# Altium PCB PHX_COLDFLOW_CONTROLLER.PcbDoc
Units mil, origin at the board's own origin, x right, y up, seen from the top; angles counter-clockwise.
Board outline 2730.15 x 2079.62 mil, 2 copper layers (Top Layer, Bottom Layer); 6 components, 12 nets, 70 pads, 4 vias.
Unrouted connection lines stored in the file: 4.
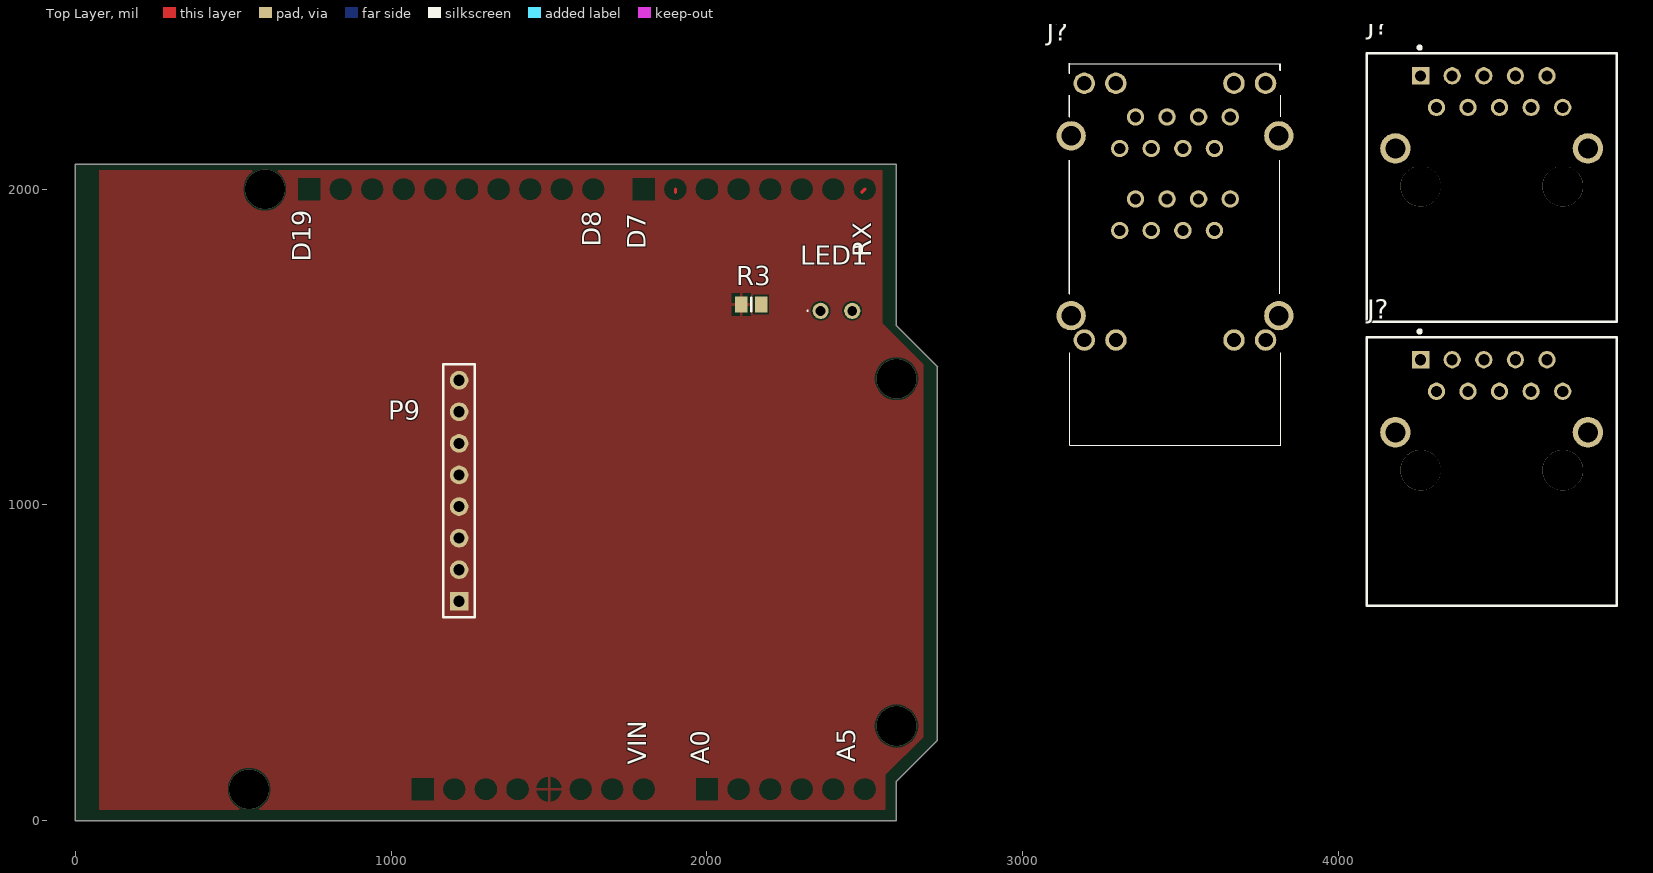
[diagram p0: Top Layer view]
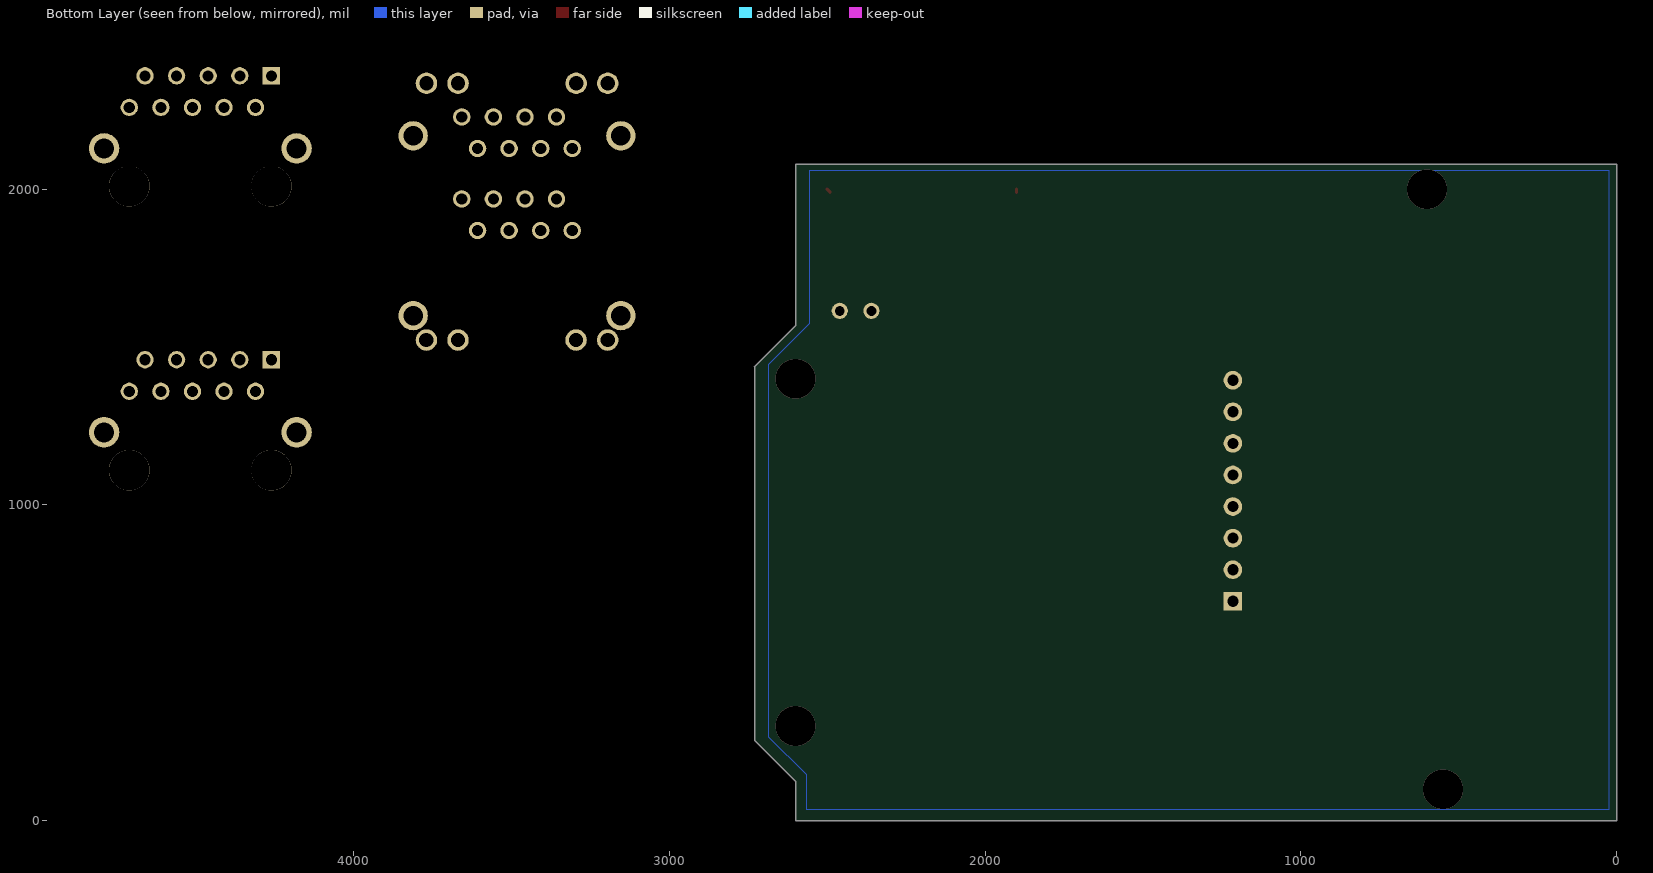
[diagram p1: Bottom Layer view, seen from below]

## Layer stack, top to bottom
Top Solder: solder mask 0.4, Solder Resist, Dk 3.5
Top Layer: signal copper 1.4
Dielectric 1: dielectric 12.6, FR-4, Dk 4.8
Bottom Layer: signal copper 1.4
Bottom Solder: solder mask 0.4, Solder Resist, Dk 3.5

## Board outline
0,0 0,2079.62 2600.15,2079.62 2600.15,1567.81 2633.6,1534.36 2730.15,1437.81 2730,1436.1 2730,255 2633.45,158.45 2600,125 2600,0

## Design rules (kind name [scope] priority, off if disabled: settings)
Clearance [All] p1: gap=5 ignorepadtopadclearanceinfootprint=FALSE except(0: Arc-Hole Track-Hole SMDPad-Hole THPad-Hole Via-Hole Fill-Hole Poly-Hole Region-Hole Text-Hole)
PolygonConnect [All] p1: connectstyle=Relief reliefconductorwidth=10 reliefentries=4 polygonreliefangle="90 Angle" airgapwidth=10
RoutingVias [All] p1: holewidth=28 width=50 viastyle="Through Hole" minholewidth=28 minwidth=50 maxholewidth=28 maxwidth=50
SolderMaskExpansion [All] p1: expansion=4 istentingtop=FALSE
Width [All] p1: maxlimit=50 minlimit=10 preferedwidth=10 minimp=50.000000 maximp=50.000000 favimp=50.000000
30 further rules are at their usual default settings.

## Classes and differential pairs
component class PHX_COLDFLOW_MAIN: J? LED1 P9 R3

## Components (designator, comment, footprint, x,y, rotation, side; value= is the part's Value field where it differs from the comment)
J? "RJE1R288225413" RJE1R288225413 3657.05,2229.06 r0 top
J? "HFJ11-1G01ERL" FP-HFJ11-1G01ERL-MFG 4485,2005 r0 top
J? "HFJ11-1G01ERL" FP-HFJ11-1G01ERL-MFG 4485,1105.87 r0 top
LED1 "HLMP-Y601-J0000" HLMPY601J0000 2360,1615 r0 top
P9 "SD_CARD" HDR1X8 1215,695 r90 top
R3 "Res1" 6-0805_L 2140,1635 r0 top value=1K

## Footprints (in the part's own frame and the unit in brackets; to place one, negate y for a bottom-side part, rotate by r counter-clockwise, add the part's x,y. Pads: shape width x height; smd on the part's side, far side on the other; paste and mask are expansions set on the pad)
6-0805_L [mm] "Chip Resistor, Body 2.0x1.2mm, IPC High Density"
  rect 1x1.3 smd: 1(-0.8,0) 2(0.8,0)
  silkscreen extent 0,-0.55 0,0.55, body extent -1.07,-0.7 1.07,0.7, height 0.7
FP-HFJ11-1G01ERL-MFG [mm]
  rect 1.39x1.39 hole 0.89 paste-1000 mask+0: 1(-5.715,8.995)
  round 1.39 hole 0.89 paste-1000 mask+0: 2(-4.445,6.455) 3(-3.175,8.995) 4(-1.905,6.455) 5(-0.635,8.995) 6(0.635,6.455) 7(1.905,8.995) 8(3.175,6.455) 9(4.445,8.995) 10(5.715,6.455)
  round 2.45 hole 1.6 paste-1000 mask+0: 15(-7.745,3.155) 16(7.745,3.155)
  round 3.25 hole 3.25 unplated paste-1000 mask+0: ""(-5.715,0.105) ""(5.715,0.105)
  silkscreen extent -10.05,-10.79 10.05,11.39, body extent -10.15,-10.89 10.15,10.89, height 0.25
HDR1X8 [mm] "Connector; Header; 8 Position"
  rect 1.5x1.5 hole 0.9: 1(0,0)
  round 1.5 hole 0.9: 2(2.54,0) 3(5.08,0) 4(7.62,0) 5(10.16,0) 6(12.7,0) 7(15.24,0) 8(17.78,0)
  silkscreen extent -1.27,-1.27 19.05,1.27
HLMPY601J0000 [mm]
  round 1.3 hole 0.8: 1(0,0) 2(2.54,0)
  silkscreen extent -1.1,-0.05 -1,0.05, body extent -0.63,-1.9 3.17,1.9, height 6.3
RJE1R288225413 [mm]
  round 1.4 hole 0.9: A1(0,0) A2(-1.27,-2.54) A3(-2.54,0) A4(-3.81,-2.54) A5(-5.08,0) A6(-6.35,-2.54) A7(-7.62,0) A8(-8.89,-2.54) B1(-8.89,-9.14) B2(-7.62,-6.6) B3(-6.35,-9.14) B4(-5.08,-6.6) B5(-3.81,-9.14) B6(-2.54,-6.6) B7(-1.27,-9.14) B8(0,-6.6)
  round 1.725 hole 1.15: A9(2.84,2.7) A10(0.3,2.7) A11(-9.2,2.7) A12(-11.74,2.7) B9(2.845,-17.95) B10(0.305,-17.95) B11(-9.195,-17.95) B12(-11.735,-17.95)
  round 2.355 hole 1.57: MH1(-12.795,-15.99) MH2(3.905,-15.99) MH3(-12.795,-1.52) MH4(3.905,-1.52)
  round 1.5 hole 3 unplated: MH5(-9.45,-14.2) MH6(0.55,-14.2)
  silkscreen extent -12.95,-26.4 4.05,4.3, body extent -14.12,-26.4 4.98,4.52, height 27.61

## Part data
J?: "Connector", Manufacturer_Name="Amphenol Communications Solutions", Mouser Part Number=523-RJE1R288225413, Arrow Part Number=RJE1R288225413, Arrow Price/Stock=https://www.arrow.com/en/products/rje1r288225413/amphenol, Datasheet Link=https://cdn.amphenol-cs.com/media/wysiwyg/files/drawing/rje1r288xx5xxx.pdf, Height=26.5mm, Manufacturer_Part_Number=RJE1R288225413, Mouser Price/Stock=https://www.mouser.co.uk/ProductDetail/Amphenol-Commercial-Products/RJE1R288225413?qs=vLWxofP3U2xTD8IjigT%252BMg%3D%3D
J? J?: library part CMP-218039-000001-2, "Conn RJ-45 F 8 POS 2.54mm Solder RA Thru-Hole 10 Terminal 1 Port", Manufacturer=HALO, Package=0, Temperature="0°C to +70°C", Temperature Range High=+70°C, Temperature Range Low=0°C, Automotive=No, Category=Conn, ComponentLink2Description=Datasheet, ComponentLink2URL=https://www.haloelectronics.com/pdf/fastjack-gigabit.pdf, Conn Gender=Female, Conn Orientation=Horizontal, Contact Material=Gold, Device Class L1=Connectors, Device Class L2="Modular / Ethernet Connectors", Device Class L3=unset, Height=0.624inch, Is Female=yes, Lead Free=Yes, Manufacturer Part Number=HFJ11-1G01ERL, Mouser Description="Conn RJ-45 F 8 POS 2.54mm Solder RA Thru-Hole 10 Terminal 1 Port", Number Of Contacts=8, Octopart=https://octopart.com/hfj11-1g01erl-halo-4052130, Pitch=1.27mm, RoHS=TRUE, Shielding=true
LED1: "LED", Manufacturer_Name="Avago Technologies", Mouser Part Number=630-HLMP-Y601-J0000, Datasheet Link=https://componentsearchengine.com/Datasheets/2/HLMP-Y601-J0000.pdf, Height=6.2mm, Manufacturer_Part_Number=HLMP-Y601-J0000, Mouser Price/Stock=https://www.mouser.co.uk/ProductDetail/Broadcom-Avago/HLMP-Y601-J0000/?qs=eQsPqqG3NqZlsxOZsiOi8g%3D%3D
P9: library part "Header 8", "Header, 8-Pin", LatestRevisionDate=17-Jul-2002, LatestRevisionNote="Re-released for DXP Platform.", Publisher="Altium Limited"
R3: "Resistor", LatestRevisionDate=17-Jul-2002, LatestRevisionNote="Re-released for DXP Platform.", PackageDescription="Axial Device, Thru-Hole; 2 Leads; 0.3 in Pin Spacing", PackageReference=AXIAL-0.3, Published=8-Jun-2000, Publisher="Altium Limited"

## Via types
v1: diameter 125.98, hole 125.98, Top Layer to Bottom Layer, 4 vias

## Nets (pads, with @x,y where several pads share a name; then routed paths per layer and width w, separated by ;. In a path a pad name is that pad's centre, name@x,y a point inside that pad or via, vN(x,y) a via of type N, cw(c..) or ccw(c..) an arc to the next point about the centre after c; other vN are vias at no path point)
3V3: P9.7
5V: J?.9 P9.8 R3.1
CD: P9.1
CLK: P9.5
CS: P9.2
DI: P9.3
DO: P9.4
gnd: J?.10 J?.15 J?.16 J?.MH1 J?.MH2 J?.MH3 J?.MH4 LED1.2 P9.6
LCL: J?.3
LDA: J?.1
NetLED1_1: LED1.1 R3.2
VSS_PT: J?.4
pads on no net: J?. J?.2 J?.5 J?.6 J?.7 J?.8 J?.A1 J?.A2 J?.A3 J?.A4 J?.A5 J?.A6 J?.A7 J?.A8 J?.A9 J?.A10 J?.A11 J?.A12 J?.B1 J?.B2 J?.B3 J?.B4 J?.B5 J?.B6 J?.B7 J?.B8 J?.B9 J?.B10 J?.B11 J?.B12 J?.MH5 J?.MH6
copper on no net: | length 23.3
  Top Layer w10: 1900,1990 1900,2000 ; 2490.61,1990.61 2500,2000
  other v1: 550,100 2600,300 2600,1400 600,2000

## Polygon pours and split planes (outlines as drawn)
gnd on Bottom Layer "NONET_L02_P000" (solid, shelved, pour order 0): 25,2060 25,35 2565,35 2565,145 2685,265 2685,1445 2555,1575 2555,2060
5V on Top Layer "5V_L01_P008" (solid, pour order 8): 75,2060 75,35 2565,35 2565,145 2685,265 2685,1445 2555,1575 2555,2060

## Silkscreen, mask and mechanical layers (free items; w line width, h text height)
Top Overlay:
  text "D8" at 1682.63,1818.08 h100 r90
  text "D7" at 1825,1810 h100 r90
  text "RX" at 2540,1785 h100 r90
  text "D19" at 763.89,1770 h100 r90
  text "A5" at 2488.89,185 h100 r90
  text "A0" at 2025.63,178.35 h100 r90
  text "VIN" at 1826.53,177.12 h100 r90
Mechanical 1:
  lines w10: 0,2079.62 0,0 2600,0 2600,125 2633.45,158.45 2730,255 2730,1436.1 ; 1.1,2079.62 2601.1,2079.62 ; 2600.15,2079.62 2600.15,1567.81 2633.6,1534.36 2730.15,1437.81
Mechanical 15:
  lines w10: 15,555 15,1555 1265,1555 1265,555 15,555